# Altium PCB BB.GW.001.01.01.0.PcbDoc
Units mm, origin at the board's own origin, x right, y up, seen from the top; angles counter-clockwise.
Board outline 95.6 x 53 mm, 2 copper layers (Top Layer, Bottom Layer), stack 1.57 mm thick; 61 components, 35 nets, 169 pads, 4 vias.
Unrouted connection lines stored in the file: 4.
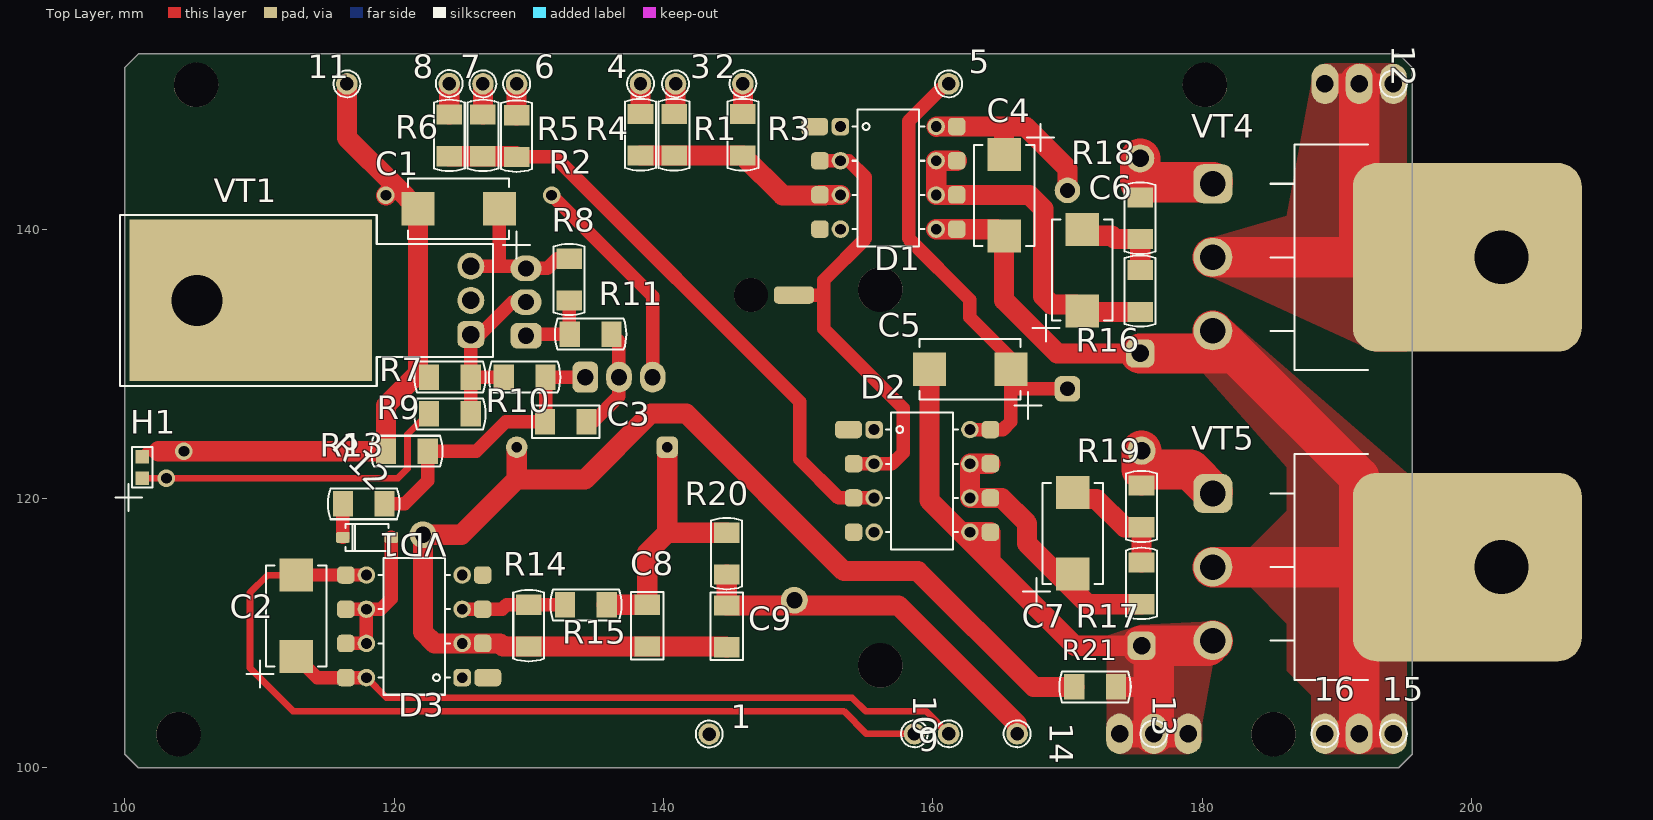
[diagram p0: Top Layer view]
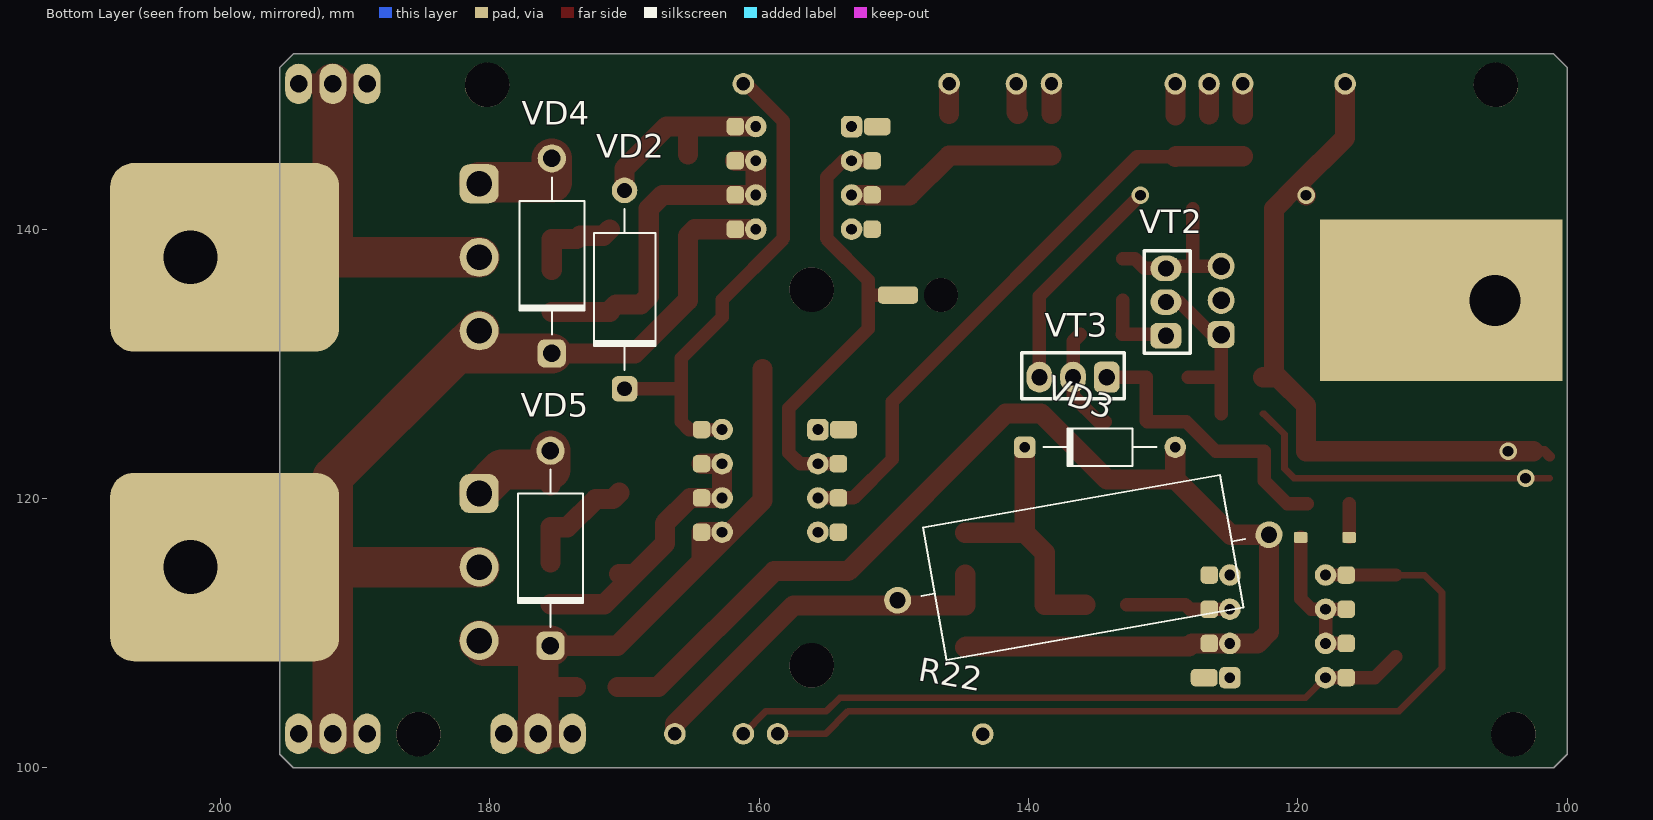
[diagram p1: Bottom Layer view, seen from below]

## Layer stack, top to bottom
Top Solder: solder mask 0.0102, Solder Resist, Dk 3.5
Top Layer: signal copper 0.035
Core: core 1.5, FR-4, Dk 4.2
Bottom Layer: signal copper 0.035
Bottom Solder: solder mask 0.0102, Solder Resist, Dk 3.5

## Board outline
101,100 100,101 100,152 101,153 194.6,153 195.6,152 195.6,101 194.6,100

## Design rules (kind name [scope] priority, off if disabled: settings)
Clearance [All] p1: gap=0.5 ignorepadtopadclearanceinfootprint=FALSE except(0: Arc-Hole Track-Hole SMDPad-Hole THPad-Hole Via-Hole Fill-Hole Poly-Hole Region-Hole Text-Hole)
ComponentClearance [All] p1: gap=0.5 collisioncheckmode=3 verticalgap=1 showdistances=FALSE
Height [All] p1: minheight=0 maxheight=25 prefheight=15
HoleSize [All] p1: absolutevalues=TRUE maxlimit=4.5 minlimit=0.5 maxpercent=80.000 minpercent=20.000
HoleToHoleClearance [All] p1: gap=0.5 allowstackedmicrovias=TRUE
MinimumSolderMaskSliver [All] p1: minsoldermaskwidth=0.3
PlaneConnect [All] p1: planeconnectstyle=Direct reliefexpansion=0.508 reliefentries=4 reliefconductorwidth=0.254 reliefairgap=0.254
PolygonConnect [All] p1: connectstyle=Direct reliefconductorwidth=0.254 reliefentries=4 polygonreliefangle="90 Angle" airgapwidth=0.254
RoutingVias [All] p1: holewidth=0.5 width=1.1 viastyle="Through Hole" minholewidth=0.5 minwidth=1.1 maxholewidth=0.5 maxwidth=1.1
SilkToSilkClearance [All] p1: silktosilkclearance=0
SilkToSolderMaskClearance [IsPad] p1: minsilkscreentomaskgap=0.2 clearancetoexposedcopper=TRUE
SolderMaskExpansion [All] p1: expansion=0.15
Width Width_PowerLine [InNetClass('PowerLine')] p1: maxlimit=5 minlimit=1.5 preferedwidth=2
Width [All] p2: maxlimit=10 minlimit=0.5 preferedwidth=0.5 minimp=50.000000 maximp=50.000000 favimp=50.000000
22 further rules are at their usual default settings.

## Classes and differential pairs
net class PowerLine: Net12_1 Net13_1 Net14_1 Net15_1 NetC8_1

## Components (designator, comment, footprint, x,y, rotation, side; value= is the part's Value field where it differs from the comment)
1 "TP" TP1#1 143.4,102.5 r0 top
2 "TP" TP1#1 145.9,150.8 r0 top
3 "TP" TP1#1 140.9,150.78 r0 top
4 "TP" TP1#1 138.3,150.8 r0 top
5 "TP" TP1#1 161.18,150.78 r0 top
6 "TP" TP1#1 129.1,150.78 r0 top
7 "TP" TP1#1 126.6,150.78 r0 top
8 "TP" TP1#1 124.1,150.8 r0 top
9 "TP" TP1#1 161.18,102.52 r0 top
10 "TP" TP1#1 158.64,102.52 r0 top
11 "TP" TP1#1 116.5,150.78 r0 top
12 "TP" TP1#2 194.2,150.78 r0 top
13 "TP" TP1#3 176.42,102.52 r0 top
14 "TP" TP1#1 166.26,102.52 r270 top
15 "TP" TP1#3 194.2,102.52 r0 top
16 "TP" TP1#3 189.12,102.52 r0 top
C1 "47 мкФ" CAPMP7343X31N 124.8,141.5 r0 top
C2 "47 мкФ" CAPMP7343X31N 112.73,111.27 r270 top
C3 "33 п" CAPC3216M 132.75,125.7 r0 top
C4 "47 мкФ" CAPMP7343X31N 165.3,142.5 r90 top
C5 "47 мкФ" CAPMP7343X31N 162.775,129.6 r0 top
C6 "2.2 мкФ" CAPMP7343X31N 171.1,136.95 r270 top
C7 "2.2 мкФ" CAPMP7343X31N 170.4,117.4 r270 top
C8 "33 п" CAPC3216M 138.8,110.55 r90 top
C9 "100 пФ" CAPC3216M 144.7,110.5 r90 top
D1 "МикросхемаHCPL-3120" DIP-8 156.7,143.8 r270 top
D2 "МикросхемаHCPL-3120" DIP-8 159.2,121.3 r270 top
D3 "МикросхемаHCPL-3120" DIP-8 121.5,110.5 r90 top
H1 "KPG-1608ZGC" LED_1608X25N 101.3,122.3 r90 top
R1 "0" RESC3216M 140.8,147 r90 top
R2 "0" RESC3216M 126.6,146.95 r90 top
R3 "0" RESC3216M 145.9,147 r90 top
R4 "0" RESC3216M 138.3,147 r90 top
R5 "0" RESC3216M 129.1,146.9 r90 top
R6 "0" RESC3216M 124.1,146.95 r90 top
R7 "270" RESC3216M 124.15,129 r180 top
R8 "270" RESC3216M 133,136.25 r270 top
R9 "270" RESC3216M 124.15,126.28 r180 top
R10 "270" RESC3216M 129.7,129 r0 top
R11 "270" RESC3216M 134.6,132.2 r0 top
R12 "270" RESC3216M 117.75,119.6 r180 top
R13 "270" RESC3216M 120.95,123.5 r180 top
R14 "620" RESC3216M 130,110.55 r270 top
R15 "270" RESC3216M 134.25,112.1 r0 top
R16 "270 k" RESC3216M 175.4,135.4 r90 top
R17 "270 k" RESC3216M 175.5,113.696 r90 top
R18 "10" RESC3216M 175.4,140.8 r90 top
R19 "10" RESC3216M 175.5,119.4 r90 top
R20 "270" RESC3216M 144.7,115.9 r270 top
R21 "0" RESC3216M 172.05,106 r0 top
R22 "0.11" RESW_SQP-7 135.937,114.869 r170 bottom
VD1 "1N4148" SOD-123 118,117.1 r180 top
VD2 "FR20" DO-15 170,135.5 r90 bottom
VD3 "BZX5V1" DO-35 134.7,123.8 r180 bottom
VD4 "Stabistor_P6KE15CA" D2A 175.4,138 r90 bottom
VD5 "Stabistor_P6KE15CA" D2A 175.5,116.3 r90 bottom
VT1 "F9Z34N" TO-220_TH_Horizontal_Var#1 113.635,134.7 r90 top
VT2 "TRANSBIPOL_КТ361" Rus_КT-13 129.705,134.575 r270 bottom
VT3 "TRANSBIPOL_КТ315" Rus_КT-13 136.7,129.1 r180 bottom
VT4 "IGBT_IRG7PH42UD2PDF" TO-247AC 180.796,137.9 r270 top
VT5 "IGBT_IRG7PH42UD2PDF" TO-247AC 180.796,114.9 r270 top

## Footprints (in the part's own frame and the unit in brackets; to place one, negate y for a bottom-side part, rotate by r counter-clockwise, add the part's x,y. Pads: shape width x height; smd on the part's side, far side on the other; paste and mask are expansions set on the pad)
CAPC3216M [mm] "Chip Capacitor, Body 3.2x1.6mm, IPC Low Density"
  rect 1.5x1.9 smd: 1(-1.55,0) 2(1.55,0)
  Top Layer pour cut-out: -0.8,1.2 -0.8,-1.2 0.8,-1.2 0.8,1.2
  silkscreen extent -2.5,-1.2 2.5,1.2, body extent -1.7,-0.9 1.7,0.9, height 1.35
CAPMP7343X31N [mm] "Molded Capacitor, 2-Leads, Body 7,30x4,30mm, IPC Medium Density"
  rect 2.45x2.5 smd: 1(-3.025,0) 2(3.025,0)
  silkscreen extent -3.75,-3.7 5.3,2.25, body extent -3.97,-2.25 3.97,2.25, height 3.1
D2A [mm]
  rrect50% 2.1x2.1 hole 1.3: 1(-7.239,0)
  round 2.1 hole 1.3: 2(7.239,0)
  silkscreen extent -5.84,-2.41 5.84,2.41
DIP-8 [mm]
  rrect50% 1.3x2 all layers, no hole: 1(-3.81,-5.461)
  rrect50% 1.3x1.3 / inner rrect50% 1.3x1.3 / far side rrect50% 1.6x1.6 hole 0.8: 1(-3.81,-3.556)
  round 1.3 / inner round 1.3 / far side round 1.6 hole 0.8: 2(-1.27,-3.556) 3(1.27,-3.556) 4(3.81,-3.556) 5(3.81,3.556) 6(1.27,3.556) 7(-1.27,3.556) 8(-3.81,3.556)
  rrect50% 1.3x1.3 all layers, no hole: 2(-1.27,-5.08) 3(1.27,-5.08) 4(3.81,-5.08) 5(3.81,5.08) 6(1.27,5.08) 7(-1.27,5.08) 8(-3.81,5.08)
  silkscreen extent -5.08,-2.67 5.08,2.67, body extent -4.95,-4.95 4.95,4.95, height 4.36
DO-15 [mm]
  rrect50% 1.9x1.9 hole 1.1: 1(-7.366,0)
  round 1.9 hole 1.1: 2(7.366,0)
  silkscreen extent -5.97,-2.29 5.97,2.29
DO-35 [mm]
  rrect50% 1.6x1.6 hole 0.8: 1(-5.588,0)
  round 1.6 hole 0.8: 2(5.588,0)
  silkscreen extent -4.19,-1.4 4.19,1.4
LED_1608X25N [mm] "Chip LED lamp, 2-Leads, Body 1,60x0,80mm, IPC Medium Density"
  rect 1x1 smd: 1(-0.8,0) 2(0.8,0)
  silkscreen extent -3.25,-0.75 1.5,2, body extent -0.8,-0.4 0.8,0.4, height 0.62
RESC3216M [mm] "Chip Resistor, Body 3.2x1.6mm, IPC Low Density"
  rect 1.5x1.9 smd: 1(-1.55,0) 2(1.55,0)
  Top Layer pour cut-out: -0.8,0.95 -0.8,-0.95 0.8,-0.95 0.8,0.95
  silkscreen extent -2.65,-1.15 2.65,1.15, body extent -1.68,-0.87 1.68,0.87, height 0.71
RESW_SQP-7 [mm] "Резистор мощный проволочный 5Вт; Body"
  round 2 hole 1.2: 1(-14,0) 2(14,0)
  silkscreen extent -12.2,-5 12.2,5, body extent -14.4,-4.5 14.4,4.5, height 9.5
Rus_КT-13 [mm] "THD; Body: L=7.2mm, B=3mm, H=5mm; Weight: ?g; Транзистор КТ315(А...И)"
  rrect50% 1.9x2.3 hole 1.2: B(2.5,-0.1)
  oval 1.9x2.3 hole 1.2: C(0,-0.1) E(-2.5,-0.1)
  silkscreen extent -3.8,-1.7 3.8,1.7, body extent -3.6,-1.5 3.6,1.5, height 6.7
SOD-123 [mm]
  rrect25% 1x0.8 all layers, no hole: 1(-1.8,0) 2(1.8,0)
  silkscreen extent -1.6,-1 1.6,1, body extent -1.9,-0.8 1.9,0.8, height 1.4
TO-220_TH_Horizontal_Var#1 [mm] "Transistor outline, TO-220, TH, требуеться прошивка. Формовку выводов см. приспособление ЛБИЮ.7803-0021-000 СБ"
  rrect50% 2x2 hole 1.3: 1(-2.54,-12.065)
  round 2 hole 1.3: 2(0,-12.065) 3(2.54,-12.065)
  rect 12x18 hole 3.8 copper offset 0,-3.986: 4(0,8.255)
  silkscreen extent -6.35,-13.72 6.35,13.97, body extent -5.27,-12.3 5.27,11.05, height 4.7
TO-247AC [mm]
  rrect25% 14x17 hole 4 copper offset 0,-2.54: C(0,21.439)
  round 2.9 hole 1.9: C(0,0) E(5.46,0)
  rrect50% 2.9x2.9 hole 1.9: G(-5.46,0)
  silkscreen extent -8.38,4.29 8.38,11.53, body extent -8,-0.41 8,27.18, height 5.31
TP1#1 [mm] "Test point 1x1.6"
  round 1.6 hole 1 paste+0: 1(0,0)
  silkscreen extent -1,-1 1,1
TP1#2 [mm] "Test point 1x1.6"
  oval 2x3 hole 1.3 paste+0: 1(0,0)
  silkscreen extent -1,-1 1,1
TP1#3 [mm] "Test point 1x1.6"
  oval 2x3 hole 1.3 unplated: 1(0,0)
  silkscreen extent -1,-1 1,1

## Part data
1 2 3 4 5 6 7 8 9 10 11 12 13 14 15 16: "Test point"
C1 C2 C4 C5 C6 C7: library part Capacitor_Polar_TAJD, "Танталовый конденсатор"
C3 C8 C9: library part Capacitor_Chip, "Чип-конденсатор"
D1 D2 D3: library part Device_HCPL-3120, "2.5 Amp Output Current IGBT Gate Drive Optocoupler"
H1: library part LED, "Светодиод"
R1 R2 R3 R4 R5 R6 R7 R8 R9 R10 R11 R12 R13 R14 R15 R16 R17 R18 R19 R20 R21: library part Resistor_Chip, "Чип-резистор"
R22: library part Resistor_TH, "Резистор"
VD1: library part Diode_4148, "Диод"
VD2: library part Diode_FR20..Serial, "Диод"
VD3: library part Diode_BZX5V1, "Диод"
VD4 VD5: "Стабилитрон"
VT1: library part FET_F9Z34N, "Транзистор полевой"
VT2 VT3: "Транзистор биполярный"
VT4 VT5: "insulated gate bipolar transistor with  ultrafast soft recovery diode"

## Free pads (board coordinates)
  rrect50% 3x1.3 all layers, no hole: 1(149.7,135.1)
  oval 2x3 hole 1.3 paste+0: 1(173.88,102.52) 1(178.96,102.52) 1(189.12,150.78) 1(191.66,102.52) 1(191.66,150.78)
  round 2.5 hole 2.5 unplated: Hole2,5(146.5,135.1)
  round 3.3 hole 3.3 unplated: MH3.3(104,102.5) MH3.3(105.3,150.7) MH3.3(156.1,107.6) MH3.3(156.1,135.5) MH3.3(180.2,150.7) MH3.3(185.3,102.5)

## Via types
v1: diameter 1.3, hole 0.8, Top Layer to Bottom Layer, 4 vias

## Nets (pads, with @x,y where several pads share a name; then routed paths per layer and width w, separated by ;. In a path a pad name is that pad's centre, name@x,y a point inside that pad or via, vN(x,y) a via of type N, cw(c..) or ccw(c..) an arc to the next point about the centre after c; other vN are vias at no path point)
GND: 11.1 C1.1 H1.2 R7.2 R13.2 VT3.E | length 67.4
  Top Layer w0.75: H1.2 101.7,123.5 102.5,123.5
  Top Layer w1: v1(131.7,142.5) 139.2,135 VT3.E
  Top Layer w1.5: 102.5,123.5 R13.2 119.4,126.9 121.5,129 ; 11.1 116.5,146.775 120.075,143.2 ; v1(119.4,142.5) 120.075,143.175 120.075,143.2 ; R7.2 121.5,129 ; 120.075,143.2 C1.1 121.775,129.275 121.5,129
  other v1: 104.4,123.5
Net1_1: 1.1 D1.2 D2.2 pad.1@149.7,135.1 pad.Hole2,5 VT1.2 | length 33.7
  Top Layer w1: pad.1@150.3,135.1 150.8,135.1 151.9,135.1 ; D1.2@151.62,145.07 153.144,145.07 153.772,145.07 155,143.842 155,139.3 151.9,136.2 151.9,135.1 ; D2.2@154.12,122.57 155.644,122.57 156.97,122.57 157.8,123.4 157.8,126.7 151.9,132.6 151.9,135.1
Net2_1: 2.1 R3.2 | length 2.3
  Top Layer w1.5: R3.2 2.1
Net3_1: 3.1 R1.2 | length 2.3
  Top Layer w1.5: R1.2 140.9,148.65 3.1
Net4_1: 4.1 R4.2 | length 2.3
  Top Layer w1.5: R4.2 4.1
Net5_1: 5.1 C5.2 D2.8 VD2.1 | length 37.1
  Top Layer w1: 5.1 160.98,150.78 158.2,148 158.2,139.3 162.756,134.744 162.756,133.444 165.8,130.4 C5.2 165.8,128.134 ; D2.8@162.756,125.11 164.28,125.11 165.21,125.11 165.8,125.7 165.8,128.134 ; VD2.1 165.8,128.134
Net6_1: 6.1 R5.2 | length 2.3
  Top Layer w1.5: R5.2 6.1
Net7_1: 7.1 R2.2 | length 2.3
  Top Layer w1.5: R2.2 7.1
Net8_1: 8.1 R6.2 | length 2.3
  Top Layer w1.5: R6.2 8.1
Net9_1: 9.1 C2.2 D3.8 | length 50.8
  Top Layer w0.5: D3.8@117.944,106.69 119.434,105.2 154.014,105.2 155.014,104.2 159.5,104.2 9.1
  Top Layer w1: C2.2 114.285,106.69 116.42,106.69 D3.8@117.944,106.69
Net10_1: 10.1 C2.1 D3.5 | length 66.1
  Top Layer w0.5: C2.1 110.595,114.295 109.3,113 109.3,107.4 112.5,104.2 153.4,104.2 155.08,102.52 10.1
  Top Layer w1: C2.1@112.745,114.31 D3.5@117.944,114.31
Net12_1: 12.1 pad.1@189.12,150.78 pad.1@191.66,150.78 VT4.C | length 39.4
  Top Layer w1.5: pad.1@189.12,150.78 191.66,150.78 12.1
  Top Layer w3: VT4.C@180.796,137.9 VT4.C@191.66,137.9 ; pad.1@191.66,150.78 VT4.C@191.66,137.9 ; VT4.C@202.235,137.9 VT4.C@191.66,137.9
Net13_1: 13.1 C5.1 D2.5 pad.1@173.88,102.52 pad.1@178.96,102.52 R21.2 VD5.1 VT5.E | length 54.2
  Top Layer w1.5: C5.1 159.75,119.85 D2.5@162.11,117.49 ; R21.2 176.42,106 ; VD5.1 170.539,109.061 164.28,115.32 ; D2.5@162.11,117.49 162.756,117.49 164.28,117.49 164.28,115.32 ; D2.5@162.11,117.49 163.195,116.405 164.28,115.32
  Top Layer w2: pad.1@173.88,102.52 13.1 pad.1@178.96,102.52
  Top Layer w3: VD5.1 VD5.1@176.42,109.061 ; 13.1 176.42,106 VD5.1@176.42,109.061 ; VT5.E 180.417,109.061 VD5.1@176.42,109.061
Net14_1: 14.1 C9.2 R20.2 R22.1 | length 28.6
  Top Layer w1.5: R20.2 C9.2 R22.1@149.725,112.05 ; R22.1 R22.1@149.725,112.05 ; 14.1 166.26,103.24 157.45,112.05 R22.1@149.725,112.05
Net15_1: 15.1 16.1 C4.1 D1.5 pad.1@191.66,102.52 VD4.1 VT4.E VT5.C | length 91.5
  Top Layer w1.5: D1.5@160.256,139.99 161.78,139.99 164.785,139.99 C4.1 165.3,134.7 169.239,130.761 VD4.1
  Top Layer w2: 16.1 191.66,102.52 15.1
  Top Layer w3: VD4.1 180.796,130.761 ; VT5.C@180.796,114.9 VT5.C@191.66,114.9 ; pad.1@191.66,102.52 VT5.C@191.66,114.9 ; VT5.C@202.235,114.9 VT5.C@191.66,114.9 ; 180.796,130.761 VT4.E 182.475,130.761 ; 180.796,130.761 182.475,130.761 ; 182.475,130.761 191.66,121.576 VT5.C@191.66,114.9
NetC1_2: C1.2 R8.1 VT1.3 VT2.E | length 11.9
  Top Layer w1: VT1.3 127.8,137.24 ; C1.2 127.825,137.265 127.8,137.24 ; R8.1 132.1,137.8 131.375,137.075 VT2.E 129.64,137.24 127.8,137.24
NetC3_1: C3.1 R10.2 R12.1 R13.1 VT3.B | length 22
  Top Layer w1: R12.1 120.8,119.6 122.5,121.3 R13.1 126.1,123.5 128.3,125.7 C3.1 131.25,125.75 R10.2 VT3.B
NetC3_2: C3.2 R11.2 VT3.C | length 8
  Top Layer w1: C3.2 134.8,125.7 136.7,127.6 VT3.C 136.7,131.65 R11.2
NetC4_2: C4.2 D1.8 VD2.2 | length 14.7
  Top Layer w1.5: D1.8@160.27,147.596 160.285,147.61 161.78,147.61 165.3,147.61 ; C4.2 165.3,147.61 ; VD2.2 170,144.5 166.89,147.61 165.3,147.61
NetC6_1: C6.1 R16.2 R18.1 | length 6.9
  Top Layer w1.5: C6.1 171.575,139.5 173.3,139.5 173.55,139.25 R18.1 R16.2
NetC6_2: C6.2 D1.6 D1.7 R16.1 | length 26.7
  Top Layer w1.5: D1.7@161.78,145.07 160.256,145.07 160.256,142.53 161.78,142.53 167.17,142.53 168.2,141.5 168.2,135 168.8,134.4 170.625,134.4 C6.2 171.1,133.85 R16.1
NetC7_1: C7.1 R17.2 R19.1 | length 8.8
  Top Layer w1.5: C7.1 170.875,119.95 172.15,119.95 174.25,117.85 R19.1 R17.2
NetC7_2: C7.2 D2.6 D2.7 R17.1 | length 22.1
  Top Layer w1.5: D2.7@164.28,122.57 162.756,122.57 162.756,120.03 164.28,120.03 165.116,120.03 167,118.146 167,116.646 C7.2@169.271,114.375 ; C7.2 C7.2@169.271,114.375 ; R17.1 171.5,112.146 C7.2@169.271,114.375
NetC8_1: C8.1 C9.1 D3.2 R14.2 R21.1 R22.2 VD3.2 | length 93.1
  Top Layer w1.5: VD3.2 129.112,121.412 ; C9.1 144.65,109 C8.1 R14.2 128.1,109 127.87,109.23 126.58,109.23 123,109.23 122.15,110.08 R22.2 125,117.3 129.112,121.412 ; R21.1 167.5,106 158.9,114.6 153.4,114.6 141.7,126.3 139.07,126.3 134.182,121.412 129.112,121.412
NetC8_2: C8.2 R15.2 R20.1 VD3.1 | length 19.7
  Top Layer w1.5: R15.2 C8.2 138.8,115.962 140.288,117.45 ; VD3.1 140.288,117.45 ; R20.1 140.288,117.45
NetD1_3: D1.3 R1.1 R3.1 R4.1 | length 16.4
  Top Layer w1.5: R4.1 R1.1 R3.1 148.85,142.5 D1.3@151.99,142.5 ; D1.3@151.62,142.53 D1.3@153.144,142.53
NetD2_3: D2.3 R2.1 R5.1 R6.1 | length 44.6
  Top Layer w1: R5.1 131.95,145.35 150.135,127.165 150.135,122.895 153,120.03 154.12,120.03 D2.3@155.644,120.03
  Top Layer w1.5: R6.1 R2.1 129.05,145.4 R5.1
NetD3_3: D3.3 R14.1 R15.1 | length 7.8
  Top Layer w1: D3.3@125.056,111.77 128.025,111.77 128.355,112.1 R14.1 R15.1
NetD3_6: D3.6 D3.7 VD1.1 | length 12.3
  Top Layer w1: D3.7@116.42,109.23 117.944,109.23 D3.6@117.944,111.77 ; D3.6@116.42,111.77 D3.6@117.944,111.77 ; VD1.1 119.8,112.55 119.02,111.77 D3.6@117.944,111.77
NetH1_1: H1.1 R9.2 | length 24.8
  Top Layer w0.5: H1.1 v1(103.1,121.5) 120.296,121.5 121,122.204 121,124.761 122.519,126.28 R9.2
NetR7_1: R7.1 R9.1 R10.1 VT1.1 VT2.C | length 13.4
  Top Layer w1: R9.1 R7.1 ; R10.1 R7.1 ; VT2.C 128.78,134.575 126.365,132.16 VT1.1 R7.1
NetR8_2: R8.2 R11.1 VT2.B | length 5.8
  Top Layer w1: VT2.B 129.93,132.2 R11.1 133,132.25 R8.2
NetR12_2: R12.2 VD1.2 | length 2.5
  Top Layer w1: VD1.2 R12.2
NetR18_2: R18.2 VD4.2 VT4.G | length 7.2
  Top Layer w3: VD4.2 175.4,143.46 VT4.G@180.796,143.46
NetR19_2: R19.2 VD5.2 VT5.G | length 8.6
  Top Layer w1.5: R19.2 175.5,122.142
  Top Layer w3: VD5.2 175.5,122.142 179.114,122.142 VT5.G@180.796,120.46
pads on no net: D1.1 D1.4 D2.1 D2.4 D3.1 D3.4 VT1.4

## Polygon pours and split planes (outlines as drawn)
Net15_1 on Top Layer "Top_Net15_1" (solid, pour order 0): 186.3,107.207 188.11,105.397 188.11,102 189.11,101 194.2,101 195.2,102 195.2,121.9 181.9,133.4 180.1,133.4 180.1,129.3 186.3,122.3 186.3,119.1 183.6,116.4 183.6,113.4 186.3,110.7
Net12_1 on Top Layer "Top_Net12_1" (solid, pour order 2): 194.2,152.3 195.2,151.3 195.2,130.9 192.8,130.9 180.796,136.4 180.796,139.4 186.3,141 188.1,151.4 189,152.3
Net13_1 on Top Layer "Top_Net13_1" (solid, pour order 4): 172.9,102.52 172.9,109.8 175.4,110.6 180.8,110.9 182.2,109.3 180,103.3 180,102 179,101 173.9,101

## Silkscreen, mask and mechanical layers (free items; w line width, h text height)
Board:
  the board outline again, w0.4
Arduino Uno R3:
  circle w0.025: c199.28,150.78 r0.5
  circle w0.025: c196.74,150.78 r0.5
  circle w0.025: c194.2,150.78 r0.5
  circle w0.025: c191.66,150.78 r0.5
  circle w0.025: c189.12,150.78 r0.5
  circle w0.025: c186.58,150.78 r0.5
  circle w0.025: c184.04,150.78 r0.5
  circle w0.025: c176.42,150.78 r0.5
  circle w0.025: c173.88,150.78 r0.5
  circle w0.025: c171.34,150.78 r0.5
  circle w0.025: c168.8,150.78 r0.5
  circle w0.025: c166.26,150.78 r0.5
  circle w0.025: c163.72,150.78 r0.5
  circle w0.025: c161.18,150.78 r0.5
  circle w0.025: c158.64,150.78 r0.5
  circle w0.025: c153.56,150.78 r0.5
  circle w0.025: c199.28,102.52 r0.5
  circle w0.025: c196.74,102.52 r0.5
  circle w0.025: c194.2,102.52 r0.5
  circle w0.025: c191.66,102.52 r0.5
  circle w0.025: c189.12,102.52 r0.5
  circle w0.025: c181.5,102.52 r0.5
  circle w0.025: c178.96,102.52 r0.5
  circle w0.025: c176.42,102.52 r0.5
  circle w0.025: c173.88,102.52 r0.5
  circle w0.025: c171.34,102.52 r0.5
  circle w0.025: c168.8,102.52 r0.5
  circle w0.025: c166.26,102.52 r0.5
  circle w0.025: c163.72,102.52 r0.5
  circle w0.025: c161.18,102.52 r0.5
  circle w0.025: c161.18,102.52 r0.5
  circle w0.025: c158.64,102.52 r0.5
  circle w0.025: c108.85,150.78 r0.5
  circle w0.025: c118,102.52 r0.5
  circle w0.025: c105.3,150.78 r1.587
  circle w0.025: c156.1,135.54 r1.587
  circle w0.025: c104.03,102.52 r1.587
  circle w0.025: c156.1,107.6 r1.587
  circle w0.025: c135.78,150.78 r0.5
  circle w0.025: c131.71,150.78 r0.5
  circle w0.025: c135.78,102.52 r0.5
  circle w0.025: c140.86,102.52 r0.5
  circle w0.025: c153.56,102.52 r0.5
  circle w0.025: c111.39,150.78 r0.5
  circle w0.025: c113.93,150.78 r0.5
  circle w0.025: c116.47,150.78 r0.5
  circle w0.025: c119.01,150.78 r0.5
  circle w0.025: c121.55,150.78 r0.5
  circle w0.025: c124.09,150.78 r0.5
  circle w0.025: c126.63,150.78 r0.5
  circle w0.025: c129.17,150.78 r0.5
  circle w0.025: c138.32,150.78 r0.5
  circle w0.025: c140.86,150.78 r0.5
  circle w0.025: c143.4,150.78 r0.5
  circle w0.025: c145.94,150.78 r0.5
  circle w0.025: c148.48,150.78 r0.5
  circle w0.025: c151.02,150.78 r0.5
  circle w0.025: c120.54,102.52 r0.5
  circle w0.025: c123.08,102.52 r0.5
  circle w0.025: c125.62,102.52 r0.5
  circle w0.025: c128.16,102.52 r0.5
  circle w0.025: c130.7,102.52 r0.5
  circle w0.025: c133.24,102.52 r0.5
  circle w0.025: c143.4,102.52 r0.5
  circle w0.025: c145.94,102.52 r0.5
  circle w0.025: c148.48,102.52 r0.5
  circle w0.025: c151.02,102.52 r0.5
  lines w0.025: 118,102.52 199.08,102.52 ; 199.08,150.78 199.08,102.52 ; 201.6,100 199.08,102.52 ; 90.06,99.98 156.1,99.98 156.1,102.52 158.64,105.06 158.64,137.826 156.1,140.366 156.1,151.82 154.6,153.32 90.06,153.32 90.06,99.98
  lines w0.254: 108.362,150.78 154.06,150.78 199.08,150.78
  text "SCL" at 109.275,152 h1.5 r90
  text "SDA" at 111.815,152 h1.5 r90
  text "AREF" at 114.355,152 h1.5 r90
  text "GND" at 116.895,152 h1.5 r90
  text "D13" at 119.435,152 h1.5 r90
  text "D12" at 121.975,152 h1.5 r90
  text "D11~~" at 124.515,152 h1.5 r90
  text "D10~~" at 127.055,152 h1.5 r90
  text "D9~~" at 129.595,152 h1.5 r90
  text "D8" at 132.135,152 h1.5 r90
  text "D7" at 136.205,152 h1.5 r90
  text "D6~~" at 138.745,152 h1.5 r90
  text "D5~~" at 141.285,152 h1.5 r90
  text "D4" at 143.825,152 h1.5 r90
  text "D3~~" at 146.365,152 h1.5 r90
  text "D2" at 148.905,152 h1.5 r90
  text "D1(RX<-)" at 151.445,152 h1.5 r90
  text "D0(RX<-)" at 153.985,152 h1.5 r90
  text "A5" at 154.051,98.171 h1.5 r90
  text "A6" at 118.495,98.157 h1.5 r90
  text "I0REF" at 121.035,98.157 h1.5 r90
  text "RESET" at 123.575,98.157 h1.5 r90
  text "3.3V" at 126.115,98.157 h1.5 r90
  text "5V" at 128.655,98.157 h1.5 r90
  text "GND" at 131.195,98.157 h1.5 r90
  text "GND" at 133.735,98.157 h1.5 r90
  text "VIN" at 136.275,98.157 h1.5 r90
  text "A0" at 141.355,98.157 h1.5 r90
  text "A1" at 143.895,98.157 h1.5 r90
  text "A2" at 146.435,98.157 h1.5 r90
  text "A3" at 148.975,98.157 h1.5 r90
  text "A4" at 151.515,98.157 h1.5 r90